# Altium PCB expansion.PcbDoc
Units mil, origin at the board's own origin, x right, y up, seen from the top; angles counter-clockwise.
Board outline 910.59 x 872.97 mil, 4 copper layers (Top Layer, Layer SCL, Layer SDA, Bottom Layer), stack 14.156 mil thick; 16 components, 10 nets, 66 pads, 25 vias.
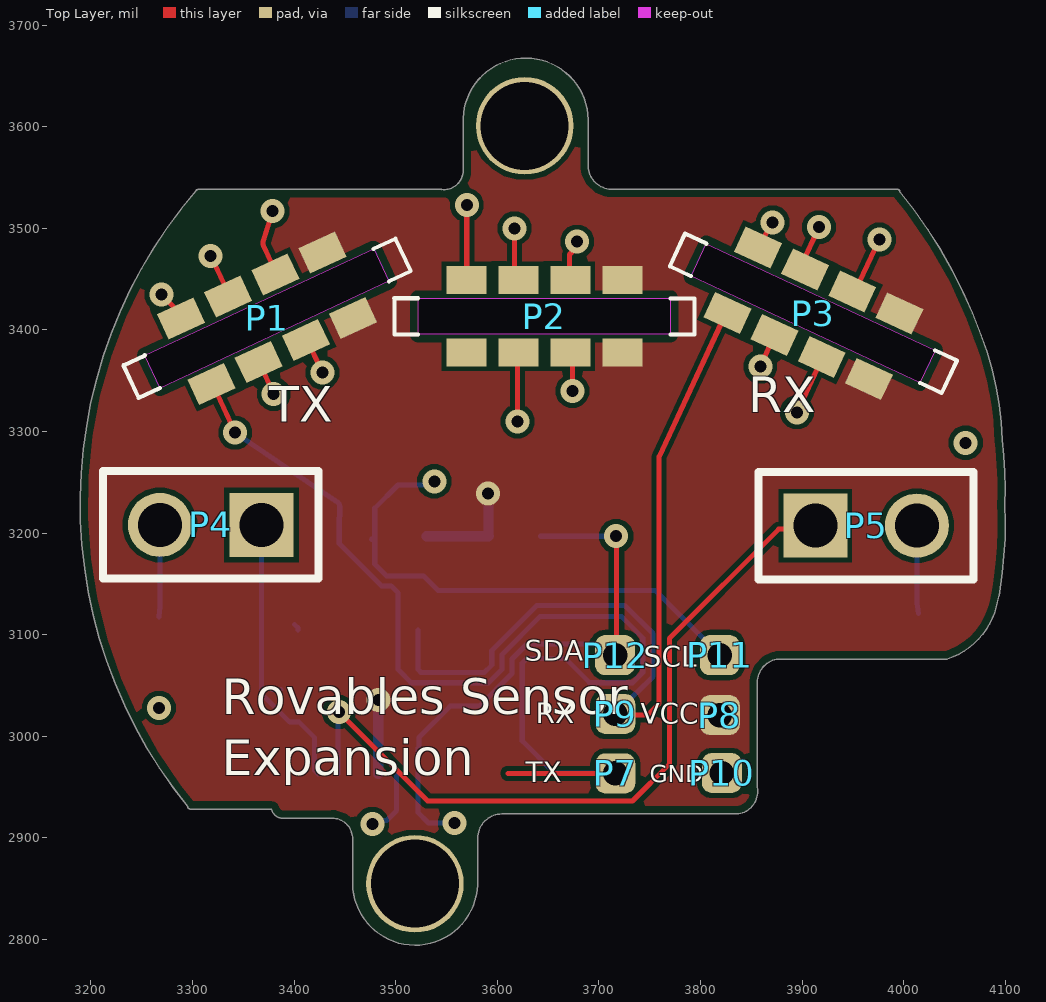
[diagram p0: Top Layer view]
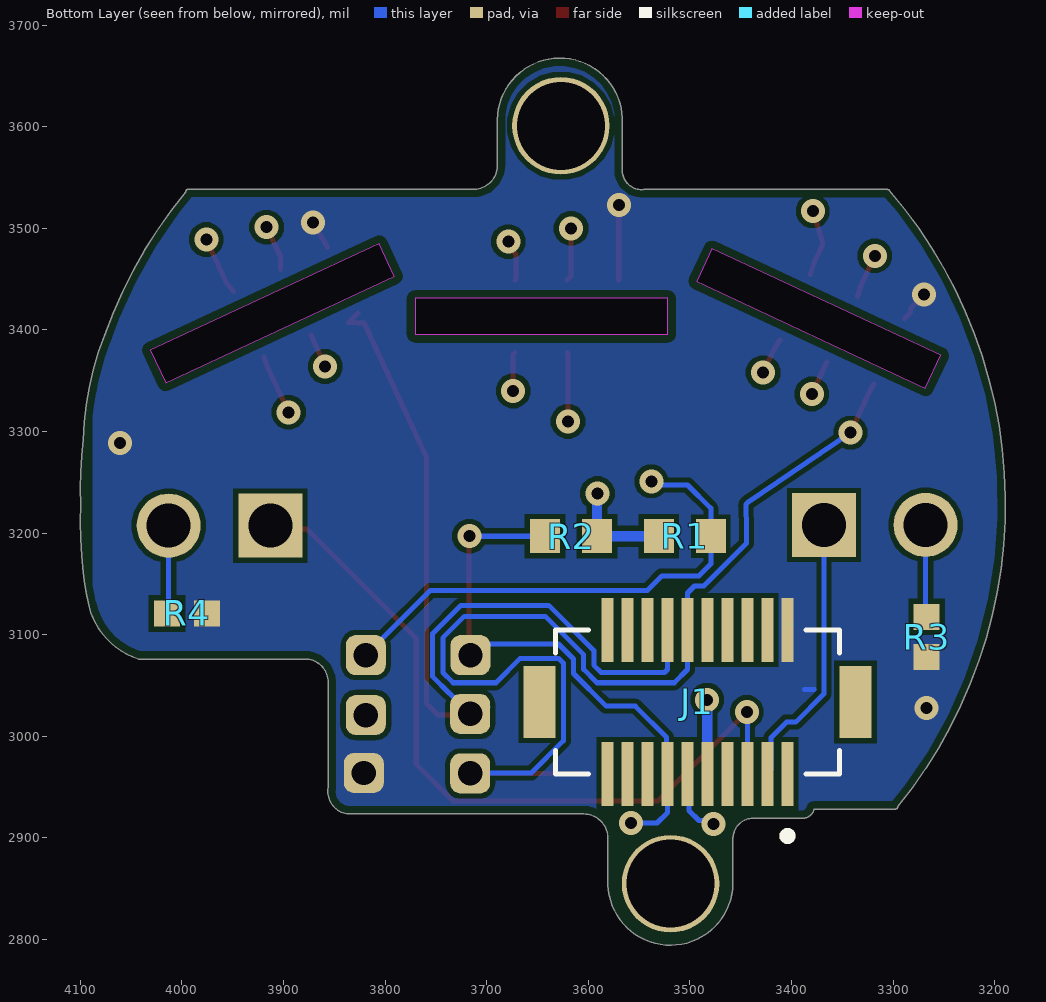
[diagram p1: Bottom Layer view, seen from below]
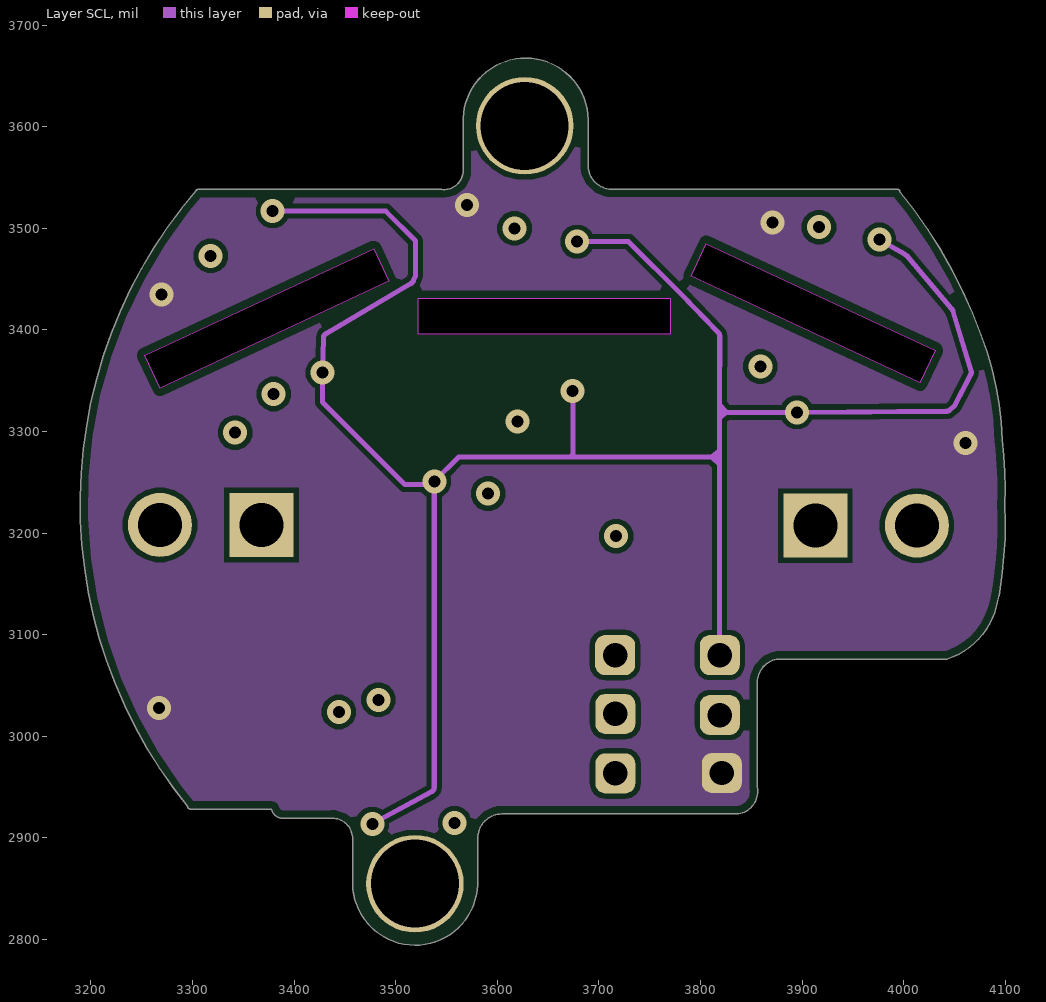
[diagram p2: Layer SCL]
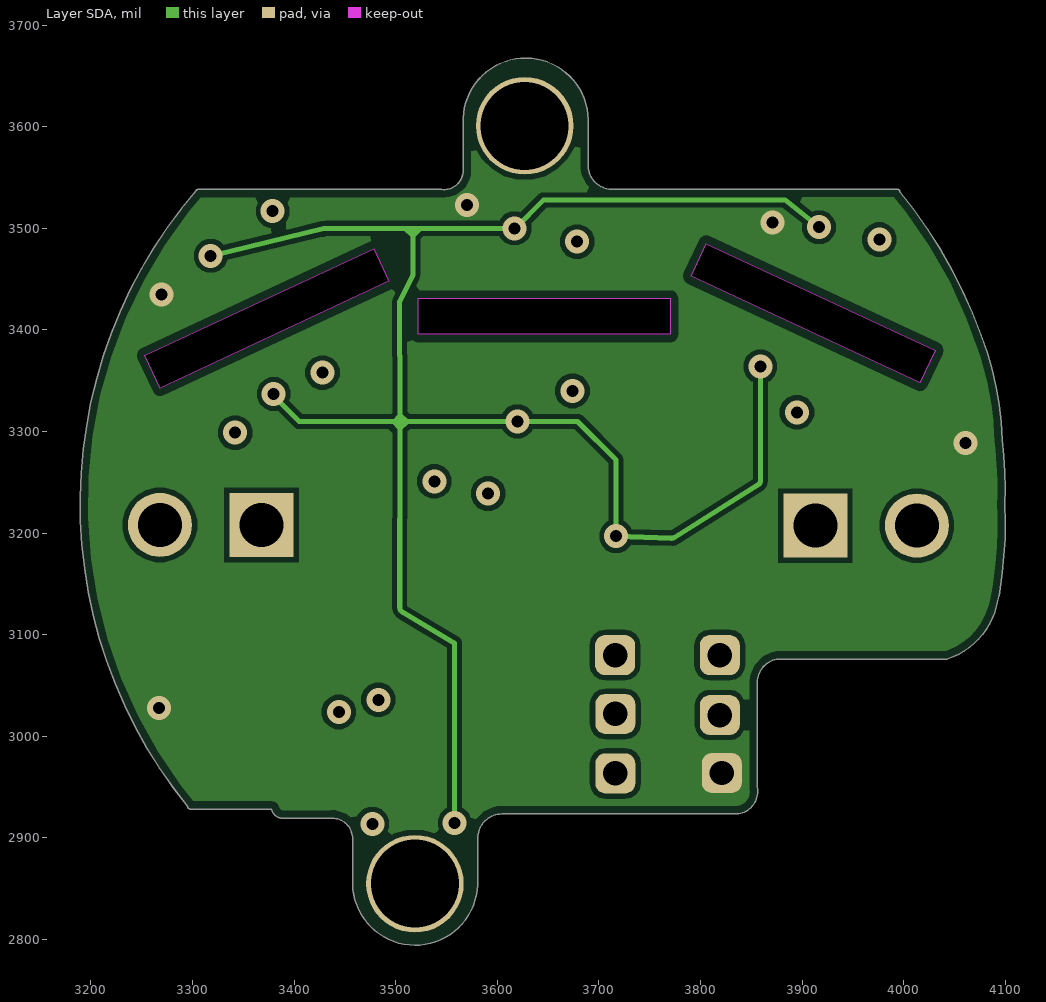
[diagram p3: Layer SDA]
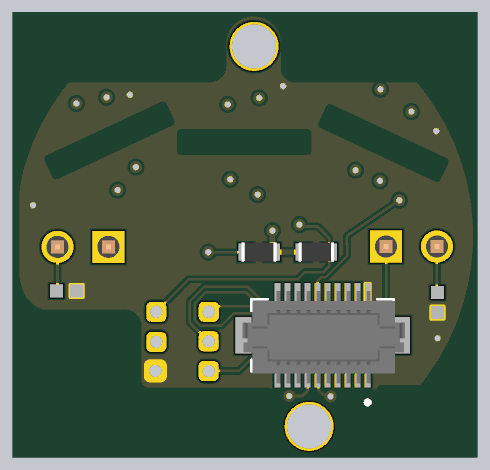
[diagram p4: 3D render of the assembled board from below, using the file's embedded part models]

## Layer stack, top to bottom
Top Solder: solder mask 0.4, Solder Resist, Dk 3.5
Top Layer: signal copper 1.4
Dielectric 2: prepreg 2.8, PP-006, Dk 4.1
Layer SCL: signal copper 1.378
Dielectric 3: prepreg 2.8, PP-006, Dk 4.1
Layer SDA: signal copper 1.378
Dielectric 1: core 3, FR-4, Dk 4.2
Bottom Layer: signal copper 1.4
Bottom Solder: solder mask 0.4, Solder Resist, Dk 3.5

## Board outline
3388.99,2919.49 3436,2919.49 ccw(c3436,2921.97) 3436.17,2919.49 cw(c3437.55,2899.49) 3457.59,2900.91 3457.59,2855 ccw(c3460.62,2854.99) 3457.6,2854.88 cw(c3462.69,2855.03) 3457.59,2855.02 cw(c3460.52,2855.06) 3457.59,2855.06 3457.6,2854.88 ccw(c3519.14,2856) 3580.69,2853.78 ccw(c3580.33,2853.85) 3580.7,2854 3580.7,2899.93 cw(c3604.72,2899.63) 3604.47,2923.68 3837.68,2923.68 ccw(c3833.68,2945.99) 3856,2950 3856,3030.26 3856,3053.35 cw(c3878.95,3053.23) 3878.83,3076.17 3982.51,3076.17 4043,3076.17 ccw(c4019.95,3146.21) 4091.3,3127.6 ccw(c3903.99,3176.75) 4097,3161 ccw(c3710.05,3210.11) 4099.69,3228.03 ccw(c3728.16,3244.44) 4097,3292 ccw(c3798.55,3284.77) 4091.3,3343.26 ccw(c3786.77,3282.21) 4076.15,3395.03 ccw(c3627.16,3233.78) 3996.3,3535.99 ccw(c3996.28,3535.99) 3996.27,3536 ccw(c3993.79,3536.03) 3993.76,3538.51 3714,3538.51 ccw(c3713.94,3538.47) 3713.88,3538.51 cw(c3713.01,3561.99) 3689.53,3561.1 ccw(c3689.18,3561.19) 3689.51,3561.35 3689.51,3606 ccw(c3688.62,3606.16) 3689.46,3606.48 ccw(c3688.45,3606.85) 3689.51,3607 ccw(c3689.5,3607.02) 3689.51,3607.04 ccw(c3627.95,3606.05) 3566.42,3608.3 ccw(c3568.07,3608.05) 3566.41,3608 3566.41,3555.08 ccw(c3568.9,3555.08) 3566.43,3554.72 cw(c3547.46,3557.33) 3545.3,3538.3 cw(c3545.29,3538.29) 3545.28,3538.3 3545.3,3538.3 ccw(c3545.13,3537.99) 3545,3538.32 3305.63,3538.29 ccw(c3305.51,3536.01) 3303.71,3537.42 ccw(c3662.6,3229.11) 3295.33,2930.84 ccw(c3297.84,2931) 3297.84,2928.49 3377.76,2928.49 ccw(c3389,2931)

## Design rules (kind name [scope] priority, off if disabled: settings)
BoardOutlineClearance [All] p1: gap=7.87 ignorepadtopadclearanceinfootprint=FALSE
Clearance [All] p1: gap=5 ignorepadtopadclearanceinfootprint=FALSE except(9.84: Arc-Hole Track-Hole SMDPad-Hole THPad-Hole Via-Hole Fill-Hole Poly-Hole Region-Hole Text-Hole)
ComponentClearance [All] p1: gap=5 collisioncheckmode=3 verticalgap=5 showdistances=TRUE
DiffPairsRouting [All] p1: maxlimit=10 minlimit=5 mostfreqgap=10 toplayer_prefgap=5 toplayer_minwidth=5 toplayer_maxwidth=1000 toplayer_prefwidth=5 midlayer1_mingap=10 midlayer1_minwidth=15 midlayer1_maxwidth=15 midlayer1_prefwidth=15 midlayer2_mingap=10 midlayer2_minwidth=15 midlayer2_maxwidth=15 midlayer2_prefwidth=15 bottomlayer_prefgap=5 bottomlayer_minwidth=5 bottomlayer_maxwidth=1000 bottomlayer_prefwidth=5 maxuncoupledlength=500
Height [All] p1: minheight=0 maxheight=71497.94 prefheight=500
HoleSize [All] p1: absolutevalues=TRUE maxlimit=248.03 minlimit=11.81 maxpercent=80.000 minpercent=20.000
HoleToHoleClearance [All] p1: gap=9.84 allowstackedmicrovias=FALSE
MinimumAnnularRing [All] p1: minimumring=3
MinimumSolderMaskSliver [All] p1: minsoldermaskwidth=0
PlaneClearance [All] p1: clearance=5
PlaneConnect PlaneConnectPowerPads [InPadClass('PowerPads')] p1: planeconnectstyle=Direct reliefexpansion=20 reliefentries=4 reliefconductorwidth=10 reliefairgap=10
PlaneConnect [All] p2: planeconnectstyle=Direct reliefexpansion=11.81 reliefentries=4 reliefconductorwidth=5 reliefairgap=5
PolygonConnect PolygonConnectPowerPads [All vs (InPadClass('PowerPads'))] p1: connectstyle=Direct reliefconductorwidth=10 reliefentries=4 polygonreliefangle="90 Angle" airgapwidth=10
PolygonConnect [All] p2: connectstyle=Direct reliefconductorwidth=5 reliefentries=4 polygonreliefangle="90 Angle" airgapwidth=5
RoomDefinition expansion [InComponentClass('expansion')] p1: confinementstyle=ConfineIn formatcopy=TRUE lockcomponents=FALSE outline 0,0 2000,0 2000,1000 0,1000
RoutingVias [All] p1: holewidth=11.81 width=23.62 viastyle="Through Hole" minholewidth=11.81 minwidth=23.62 maxholewidth=23.62 maxwidth=259.84
SilkToSilkClearance [All] p1: silktosilkclearance=0
SilkToSolderMaskClearance [IsPad] p1: minsilkscreentomaskgap=5 clearancetoexposedcopper=TRUE
SolderMaskExpansion [All] p1: expansion=2.95 istentingtop=FALSE
Width [All] p1: maxlimit=1000 minlimit=5 preferedwidth=5 midlayer1_maxwidth=10 midlayer2_maxwidth=10 minimp=50.000000 maximp=50.000000 favimp=50.000000
20 further rules are at their usual default settings.

## Components (designator, comment, footprint, x,y, rotation, side; value= is the part's Value field where it differs from the comment)
J1 "DF12NB(3.0)-20DS-0.5V(51)" HRS_DF12NB(3.0)-20DS-0.5V(51) 3492.58,3033.87 r180 bottom
P1 "vertical_4pos_conn" "vertical_4pos_conn _s_square" 3435.51,3460 r295 top
P2 "vertical_4pos_conn" "vertical_4pos_conn _s_square" 3723.18,3431.11 r270 top
P3 "vertical_4pos_conn" "vertical_4pos_conn _s_square" 3988.19,3400 r245 top
P4 "61300211121" 61300211121 3318,3208.14 r180 top
P5 "61300211121" 61300211121 3963,3207.46 r0 top
P7 "BB_TEST_TH" BB_WIRE_TEST_TH 3716.19,2963.59 r0 top
P8 "BB_TEST_TH" BB_WIRE_TEST_TH 3819,3021 r0 top
P9 "BB_TEST_TH" BB_WIRE_TEST_TH 3716.19,3022.12 r0 top
P10 "BB_TEST_TH" BB_WIRE_TEST_TH 3821,2964 r90 top
P11 "BB_TEST_TH" BB_WIRE_TEST_TH 3819,3080 r90 top
P12 "BB_TEST_TH" BB_WIRE_TEST_TH 3716,3080 r90 top
R1 "ERJ3EKF1002V" RESC1609X55X30LL15T15 3505,3197 r0 bottom
R2 "ERJ3EKF1002V" RESC1609X55X30LL15T15 3617,3197 r180 bottom
R3 "ERJ2RKF3300X" RESC1005X40X25ML05T05 3267,3098 r90 bottom
R4 "ERJ2RKF3300X" RESC1005X40X25ML05T05 3995,3121 r0 bottom

## Footprints (in the part's own frame and the unit in brackets; to place one, negate y for a bottom-side part, rotate by r counter-clockwise, add the part's x,y. Pads: shape width x height; smd on the part's side, far side on the other; paste and mask are expansions set on the pad)
61300211121 [mm] "Pin Header, pitch 2.54 mm, THT, Vertical, single row, 2p"
  rect 1.6x1.6 hole 1.1: 1(-1.27,0)
  round 1.6 hole 1.1: 2(1.27,0)
  silkscreen extent -2.69,-1.35 2.69,1.35, body extent -2.54,-1.27 2.54,1.27, height 8.57
BB_WIRE_TEST_TH [mm]
  rrect50% 1x1 hole 0.61: 1(0,0)
HRS_DF12NB(3.0)-20DS-0.5V(51) [mm]
  rect 0.3x1.6 smd paste-2 mask+0.05: 1(2.25,-1.8) 2(2.25,1.8) 3(1.75,-1.8) 4(1.75,1.8) 5(1.25,-1.8) 6(1.25,1.8) 7(0.75,-1.8) 8(0.75,1.8) 9(0.25,-1.8) 10(0.25,1.8) 11(-0.25,-1.8) 12(-0.25,1.8) 13(-0.75,-1.8) 14(-0.75,1.8) 15(-1.25,-1.8) 16(-1.25,1.8) 17(-1.75,-1.8) 18(-1.75,1.8) 19(-2.25,-1.8) 20(-2.25,1.8)
  rect 0.8x1.8 smd: S1(3.95,0) S2(-3.95,0)
  silkscreen extent -3.55,-3.45 3.55,1.8, body extent -4,-2.4 4.1,2.2, height 2.2
RESC1005X40X25ML05T05 [mm] "Chip Resistor, 2-Leads, Body 1.00x0.50mm, IPC Low Density"
  rect 0.65x0.65 smd: 1(-0.5,0) 2(0.5,0)
  body extent -0.53,-0.27 0.53,0.28, height 0.4
RESC1609X55X30LL15T15 [mm] "Chip Resistor, 2-Leads, Body 1.75x0.95mm, IPC High Density"
  rect 0.75x0.85 smd: 1(-0.65,0) 2(0.65,0)
  body extent -0.87,-0.48 0.87,0.48, height 0.55
"vertical_4pos_conn _s_square" [mm]
  rect 0.7x1 smd: 1(-0.455,0) 1(1.35,0) 2(-0.455,-1.3) 2(1.35,-1.3) 3(-0.455,-2.6) 3(1.35,-2.6) 4(1.35,-3.9) 5(-0.455,-3.9)
  Keep-Out Layer board cut-out: 0,1.2 0.9,1.2 0.9,-5.11 0,-5.11
  silkscreen extent 0,-5.7 0.9,1.8

## Part data
J1: Package=None, Availability=Unavailable, MP=DF12NB(3.0)-20DS-0.5V(51), Price=None
P4 P5: library part CMP-1712-00002-4, "THT Vertical Pin Header WR-PHD, Pitch 2.54 mm, Single Row, 2 pins", Contact Resistance=20mOhm, manufacturer="Wurth Elektronik", Operating Temperature=-40to105degC, Rated Current=3A, Withstanding Voltage=500VAC, Working Voltage=250VAC, Datasheet URL=https://katalog.we-online.de/em/datasheet/6130xx11121.pdf, Gender=Male, Manufacturer URL=http://www.we-online.de, Mounting Technology=THT, Orientation=Vertical, Package Reference=61300211121, Packaging=Bag, Part Number=61300211121, Pin Number=2, Pitch=2.54mm, Publisher=WurthElektronik, Row Number=Single
R1 R2: library part CMP-1012-00623-3, "Chip Resistor, 10 KOhm, +/- 1%, 0.1 W, -55 to 155 degC, 0603 (1608 Metric), RoHS, Tape and Reel", Case Code (Imperial)=0603, Case Code (Metric)=1608, manufacturer=Panasonic, Max Operating Temperature=155degC, Max Power Dissipation=100mW, Min Operating Temperature=-55degC, Package Description="2-Pin Surface Mount Device, Body 1.6 x 0.85 mm", Package Quantity=1, Package Reference=603, Resistance=10KOhm, Temperature Coefficient=100ppm\/degreesC, Tolerance=1%, Voltage Rating=75V, Case\/Package=0603, Composition=ThickFilm, Contact Plating=Tin, Datasheet URL=https://industrial.panasonic.com/cdbs/www-data/pdf/RDA0000/AOA0000C304.pdf, Datasheet Version=02/2017, Depth=0.8mm, Height=0.45mm, Lead Free=LeadFree, Length=1.6mm, Manufacturer URL=http://www.panasonic.com/, Military Standard=Not, Mount=SurfaceMount, Mounting Technology=SurfaceMount, Number of Pins=2, Number of Terminations=2, Packaging=TapeandReel, Power Rating=100mW, Radiation Hardening=No, REACH SVHC=NoSVHC, RoHSCompliant=true, Termination=SMD/SMT, Voltage Rating (DC)=75V, Width=0.031inch
R3 R4: library part CMP-2002-01143-1, manufacturer=Panasonic, Part Number=ERJ2RKF3300X

## Free pads (board coordinates)
  round 96 hole 86.61: 1(3519,2855) 1(3627,3601)

## Via types
v1: diameter 23.62, hole 11.81, Top Layer to Bottom Layer, tented both sides, 25 vias

## Nets (pads, with @x,y where several pads share a name; then routed paths per layer and width w, separated by ;. In a path a pad name is that pad's centre, name@x,y a point inside that pad or via, vN(x,y) a via of type N, cw(c..) or ccw(c..) an arc to the next point about the centre after c; other vN are vias at no path point)
ENC_OUT1: J1.3 P4.1 | length 273.6
  Bottom Layer w5: P4.1 3368,3041.86 3395.86,3014 3405,3014 3420.28,2998.72 3420.28,2966.41 J1.3
ENC_OUT2: J1.5 P5.1 | length 751.4
  Top Layer w5: v1(3444,3024) 3531.6,2936.4 3733.22,2936.4 3769.35,2972.54 3769.35,3096.35 3876.93,3203.93 3909.47,3203.93 P5.1
  Bottom Layer w5: J1.5 3443.37,3023.37 v1(3444,3024)
GND: J1.2 P1.5 P2.5 P3.5 P10.1 R3.1 R4.1 | length 149.9
  Top Layer w5: v1(3269.42,3434.71) 3282.79,3421.34 3282.79,3417.34 P1.5 ; P2.5@3569.64,3449.06 3570,3449.43 v1(3570,3523) ; P3.5 v1(3871,3506)
  Bottom Layer w5: 3378,3046 3387,3046 ; J1.2@3400.59,3110 3404,3106.59 J1.2
  other v1: 3267,3028 4061,3289
NetP4_2: P4.2 R3.2 | length 90.5
  Bottom Layer w5: R3.2 3268,3127.98 P4.2
NetP5_2: P5.2 R4.2 | length 86.6
  Bottom Layer w5: P5.2 4013,3131.3 R4.2
RX: J1.14 P3.4 P9.1 | length 881.3
  Top Layer w5: P9.1 3717.32,3021 3748,3021 3759.35,3032.35 3759.35,3275.24 3820.78,3406.98 3826.72,3407.06 3836.09,3407.2 P3.4
  Bottom Layer w5: J1.14 3522.11,3065.74 3525.04,3062.81 3587.25,3062.81 3594.57,3070.13 3594.57,3084.56 3639.01,3129 3725.35,3129 3753.19,3101.17 3753.19,3058.83 3737.17,3042.81 3736.89,3042.81 P9.1 ; P9.1@3699,3029 P9.1@3701.7,3029
SCL: J1.11 P1.2 P2.2 P3.2 P11.1 R1.1 | length 3089.7
  Top Layer w5: P1.2@3381.55,3454.61 3378.12,3465.45 3369.82,3483.24 cw(c3374.35,3485.36) 3369.58,3486.87 v1(3379,3517) v1@3382.56,3513.44 ; P1.2@3411.59,3390.2 3417.5,3380.51 v1(3428,3358) v1@3428,3361.47 ; P2.2@3672,3378 3674,3376 v1(3674,3340) ; P2.2@3672,3449.06 3671,3450.06 3671,3474.29 3678.65,3481.93 v1(3678.65,3486.97) ; v1@3898.08,3322.08 v1(3895,3319) 3915.44,3362.84 P3.2@3919.35,3373.46 ; P3.2@3949.38,3437.87 3956.43,3447.02 v1(3976,3489)
  Layer SCL w5: v1(3379,3517) 3490.23,3517 3519.69,3487.54 3519.69,3453.9 3517.4,3448.37 cw(c3512.78,3450.29) 3515.33,3445.98 3431.38,3396.41 ccw(c3433.92,3392.1) 3428.93,3392.26 v1(3428,3358) 3428,3329 3509,3248 3535,3248 v1(3538,3251) ; v1(3477,2914) 3535.36,2945.57 ; 3535.37,2945.58 ccw(c3533,2949.98) 3538,2949.98 v1(3538,3251) ; v1(3674,3340) 3674.71,3339.29 3674.71,3277.93 3671.78,3275 ; v1(3678.65,3486.97) 3729.27,3486.97 3781,3435.25 3817.59,3397.46 cw(c3814,3393.98) 3819,3393.98 ; 3818.79,3312.96 3818.88,3313.04 ; P11.1@3818.88,3080.12 3818.88,3275 ; 3818.88,3267.57 3811.06,3275 ; 3818.88,3281.52 3811.06,3275 ; 3819,3393.97 3818.88,3333.47 3818.88,3326.24 ; 3825.09,3319.35 3818.88,3326.24 ; v1(3976,3489) 4001.22,3474.45 4002.56,3473.34 4047.33,3420.79 cw(c4043.52,3417.55) 4048.3,3419.01 4066.4,3359.95 cw(c4061.62,3358.48) 4066.06,3356.18 4050,3325 4045.56,3321.24 cw(c4042.32,3325.05) 4042.38,3320.05 ; 4042.35,3320.05 v1(3895,3319) 3825.09,3319 ; v1(3538,3251) 3562,3275 3671.78,3275 ; 3671.78,3275 3811.06,3275 ; 3811.06,3275 3818.88,3275 ; 3818.88,3275 3818.88,3313.04 ; 3818.88,3313.04 3818.88,3319 ; 3818.88,3313.04 3825.09,3319 ; 3818.88,3319 3825.09,3319 ; 3818.88,3319 3818.88,3326.24
  Bottom Layer w5: R1.1@3476.33,3193.93 R1.1 ; v1(3477,2914) 3480.18,2917.18 3491.13,2917.18 3500.88,2926.93 3500.88,2961.46 J1.11 ; v1(3538,3251) 3534.44,3247.44 3502.29,3247.44 3479.41,3224.56 R1.1 ; P11.1 3755.27,3143.73 3541.76,3143.73 3527.49,3158 3491,3158 3479.41,3169.59 R1.1
SDA: J1.13 P1.3 P2.3 P3.3 P12.1 R2.1 | length 2842.3
  Top Layer w5: v1(3318,3473) 3331.63,3443.77 P1.3@3335.17,3432.97 ; P1.3@3365.2,3368.57 3370.03,3358.38 v1(3380,3337) ; v1(3617,3500) 3617,3452.88 P2.3@3620.82,3449.06 ; v1(3620,3310) 3620,3377.18 P2.3@3620.82,3378 ; P12.1@3698,3091 P12.1@3701.5,3094.5 ; P12.1 3717.33,3081.33 3717.33,3196.67 v1(3717,3197) ; v1(3859,3364) P3.3@3872.96,3395.09 ; P3.3@3902.99,3459.5 3903.01,3471.93 v1(3916.66,3501.19)
  Layer SDA w5: v1(3318,3473) 3429.42,3499.86 cw(c3430.59,3495) 3430.59,3500 3517,3500 ; v1(3380,3337) 3380,3335 3405,3310 3498.05,3310 ; 3499,3309.73 3499.24,3310 ; 3504.01,3126.81 ccw(c3509.01,3126.83) 3506.41,3122.56 3558,3091.74 v1(3558,2914.69) ; 3504.01,3126.84 3504.34,3303.46 ; 3504.57,3315.77 3510.96,3310 ; 3509.72,3499.88 3517,3493.1 ; 3510.96,3309.61 3504.34,3303.46 ; 3517.21,3493.1 3524.23,3500 ; v1(3859,3364) 3859,3251.76 cw(c3854,3251.76) 3856.64,3247.52 3774.3,3195.82 cw(c3771.64,3200.05) 3771.44,3195.06 v1(3717,3197) 3717,3272 3679,3310 v1(3620,3310) 3510.96,3310 ; v1(3916.66,3501.19) 3883.33,3528.14 3645.79,3528.14 3617.65,3500 v1(3617,3500) 3524.23,3500 ; 3498.05,3310 3499.24,3310 ; 3498.05,3310 3504.33,3303.45 ; 3499.24,3310 3504.35,3310 ; 3499.24,3310 3504.35,3315.77 ; 3504.34,3303.46 3504.35,3310 ; 3504.35,3310 3504.35,3315.77 ; 3504.35,3310 3510.96,3310 ; 3504.35,3315.77 3504.35,3374.49 3503.98,3374.87 3503.98,3427.98 3516.47,3452.94 ccw(c3512,3455.18) 3517,3455.18 3517,3493.1 ; 3517,3493.1 3517,3500 ; 3517,3500 3524.23,3500
  Bottom Layer w5: v1(3558,2914.69) 3532.31,2914.69 3522.11,2924.89 3522.11,2988.59 3523.04,2989.52 3523.04,2999.07 3553.7,3029.72 3582.45,3029.72 3614.57,3061.85 3614.57,3076.27 3629.3,3091 3705,3091 P12.1 ; R2.1 v1(3717,3197)
TX: J1.12 P1.4 P7.1 | length 1118.6
  Top Layer w5: P1.4 3324.26,3337.03 v1(3342,3299) ; 3610.56,2963.59 P7.1
  Bottom Layer w5: v1@3349.94,3299.8 3345.8,3299.8 3345,3299 v1(3342,3299) 3442.75,3230.53 cw(c3439.94,3226.39) 3444.94,3226.29 3444.45,3205.29 3444.45,3189.85 3486.31,3148 3495.55,3148 3502.43,3141.13 3502.43,3065.74 3515.35,3052.81 3591.39,3052.81 3604.57,3065.99 3604.57,3080.41 3642.34,3118.19 3709.98,3118.19 3722.03,3118.18 3743.19,3097.03 3743.19,3062.97 3733.03,3052.81 3690.93,3052.81 3666.95,3076.8 3629.24,3076.8 3624.57,3072.13 3624.57,2995.6 3656.17,2964 3707.63,2964 P7.1@3708.63,2963 ; P7.1@3705,2969 P7.1@3706,2970
VCC: J1.9 P1.1 P2.1 P3.1 P8.1 R1.2 R2.2 | length 176.5
  Bottom Layer w10: J1.9 3482.87,2963.13 3482.87,3035.87 v1(3483,3036) ; R1.2 R2.2 ; v1(3591,3239) 3591.41,3238.59 R2.2 ; R2.2@3591.7,3197.3 R2.2
pads on no net: J1.1 J1.4 J1.6 J1.7 J1.8 J1.10 J1.15 J1.16 J1.17 J1.18 J1.19 J1.20 J1.S1 J1.S2 P2.4

## Polygon pours and split planes (outlines as drawn)
GND on Layer SDA "GND_L03_P006" (solid, remove dead copper, pour order 6): 3190,3669 4104,3669 4104,2791 4101,2794 3192,2794 3192,3667
GND on Layer SCL "GND_L02_P007" (solid, remove dead copper, pour order 7): 3172,3674 4138,3674 4138,2761.5 4100.5,2799 3172,2799
GND on Bottom Layer "GND_L04_P002" (solid, remove dead copper, pour order 2): 4087.55,3711.43 4087.55,2812.63 3124.49,2812.63 3128.61,3709.85
VCC on Top Layer "VCC_L01_P005" (solid, remove dead copper, pour order 5): 3189,3669 4103,3669 4103,2791 4100,2794 3191,2794 3191,3667

## Silkscreen, mask and mechanical layers (free items; w line width, h text height)
Top Overlay:
  text "RX" at 3847,3307 h60
  text "TX" at 3375.65,3297.76 h60
  text "SDA" at 3626.91,3074.46 h20
  text "SCL" at 3744.2,3068.38 h20
  text "RX" at 3638,3013 h20
  text "VCC" at 3741.17,3012.28 h20
  text "TX" at 3628,2955 h20
  text "GND" at 3750,2955 h17
  text "Rovables Sensor  / Expansion" at 3329,2950 h60
Mechanical 1:
  drawing of 410 lines, arcs and shapes, not listed
Mechanical 15:
  circle w10: c3647,3231 r472.44
  circle w3.94: c3516,2855 r69.88
  circle w3.94: c3627,3601 r69.88
  circle w5: c3627.98,3597.89 r39.37
  circle w5: c3519.13,2869.11 r39.37